# Altium PCB NewPCB1.PcbDoc (part 2 of 2)
Units mil, origin at the board's own origin, x right, y up, seen from the top; angles counter-clockwise.
Board outline 6000 x 4000 mil, 2 copper layers (Top Layer, Bottom Layer); 429 components, 190 nets, 1158 pads, 636 vias.
Unrouted connection lines stored in the file: 845.
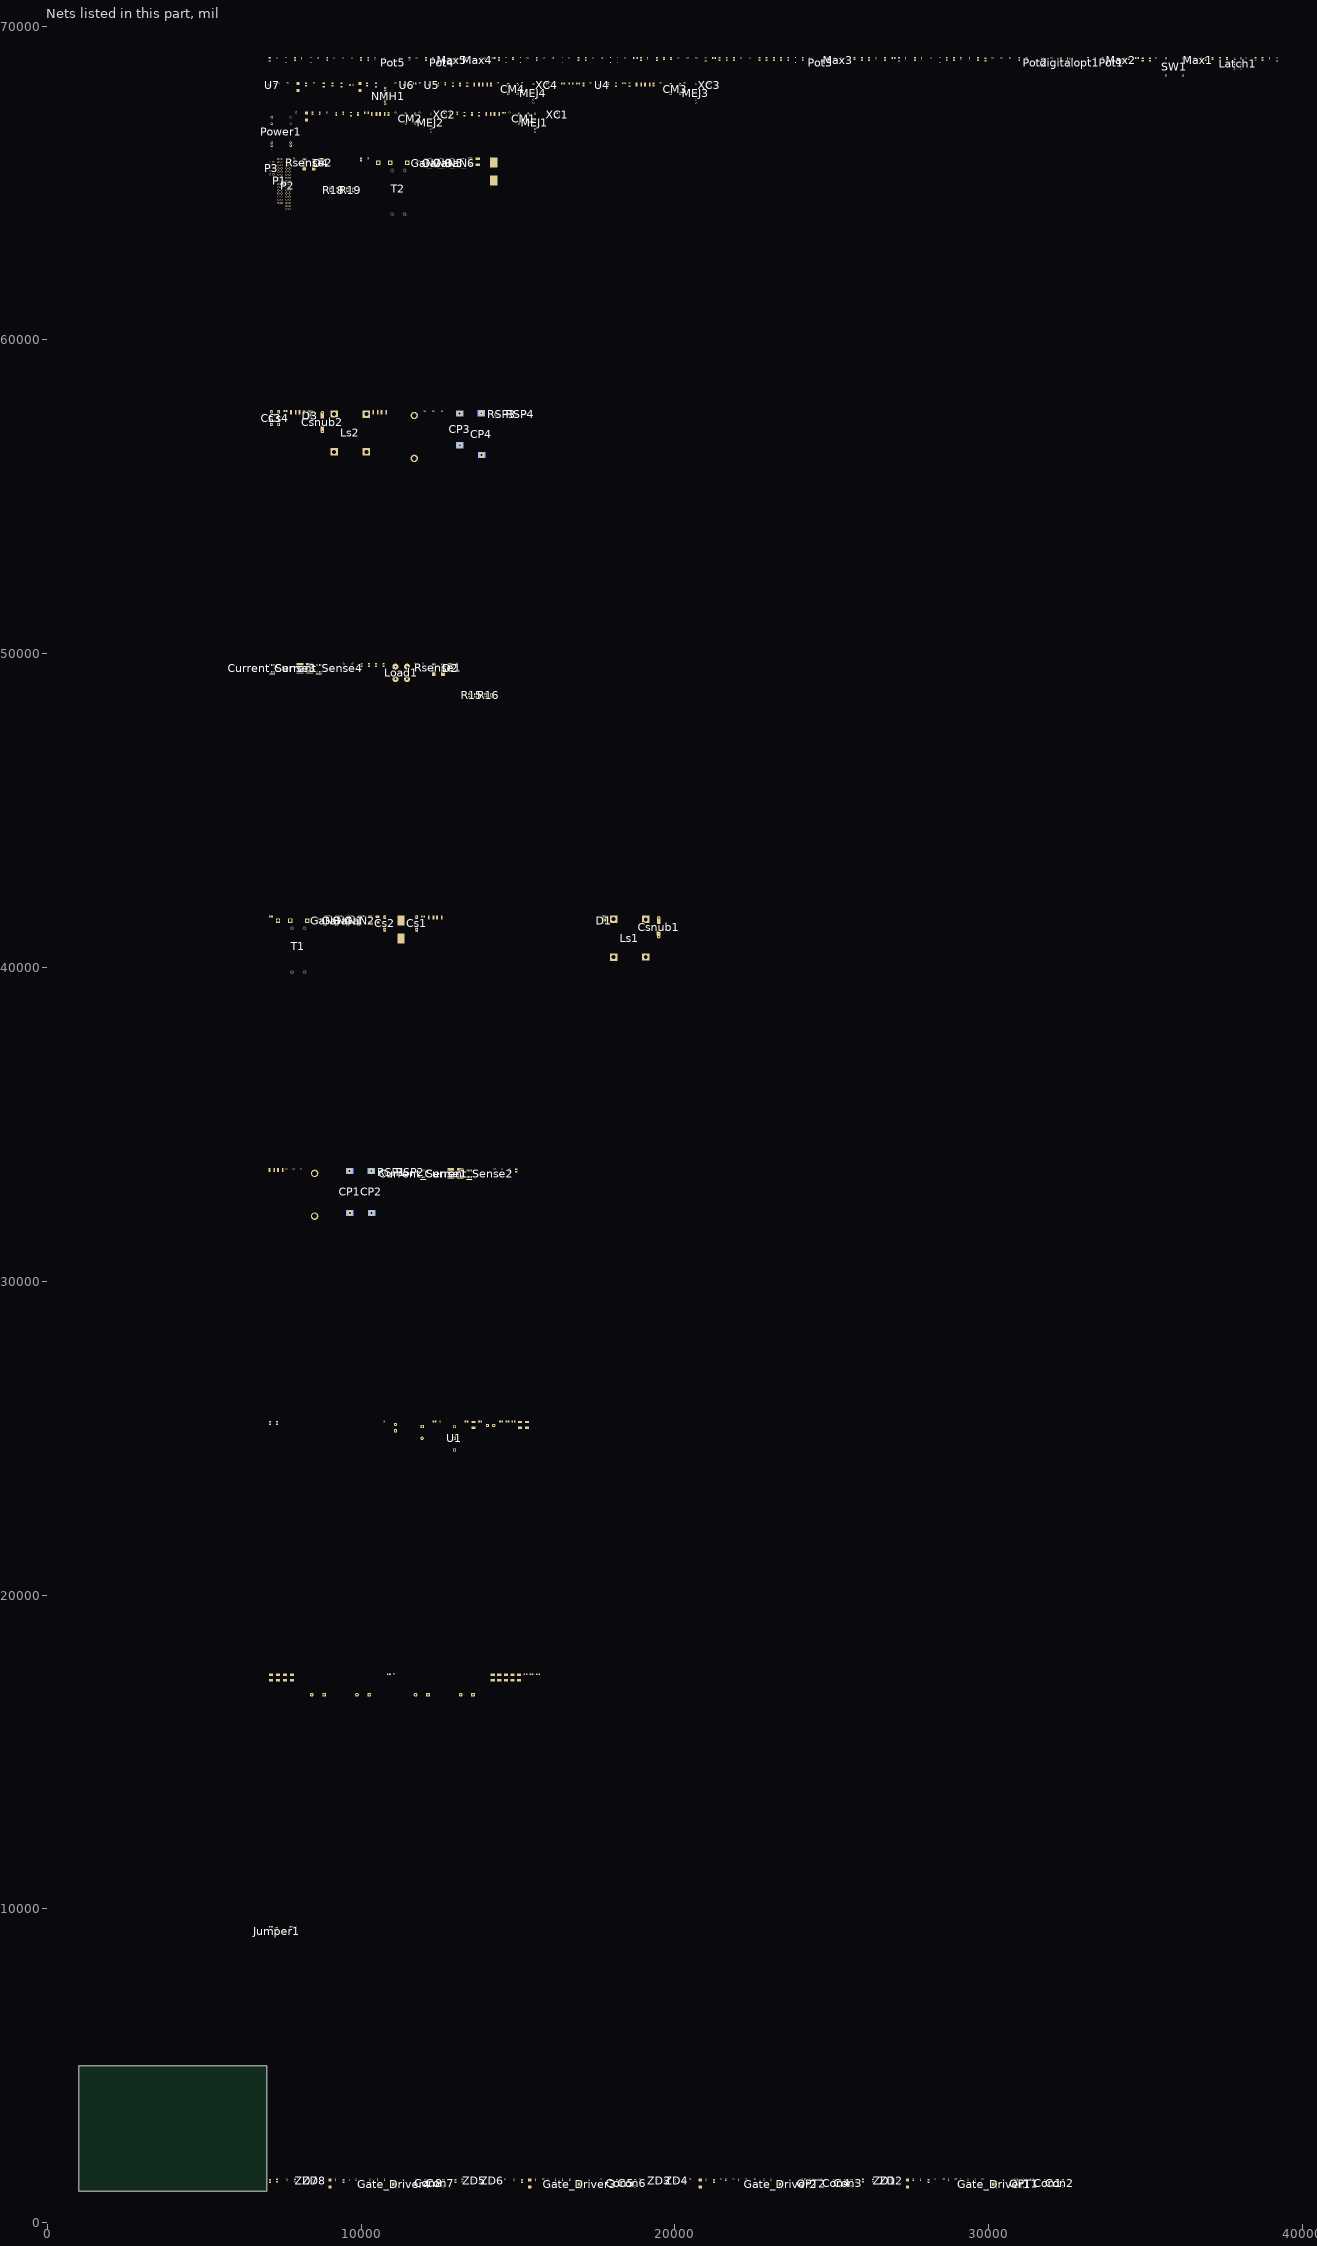
[diagram p2: the nets of this part, all layers, seen from the top]

## Part data
C1 C2 C8 C9: "LLS2A332MELC"
C17 C18 C19 C20 C27 C28 C29 C30 C39 C41 C44 C46 C47 C49 C50 C52 C70 C71 C73 C74: library part Cap_SMD
  C17 C18 C19 C20 C27 C28 C29 C30: =100nF
  C44 C70 C71 C73 C74: =470nF
C21 C22 C23 C24 C31 C32 C33 C34 C54 C57 C58 C59 C62 C63 C64 C67 C69 C72 C76 C79 C80 C82 C83 C84 C86 C87 C90 C94 C95 C98: "Polarized Capacitor (Surface Mount)", LatestRevisionDate=29-May-2009, LatestRevisionNote="IPC-7351 Footprint Added.", PackageDescription="Chip Capacitor", PackageReference=C0805, Published=8-Jun-2000, Publisher="Altium Limited"
C37 C38 C42 C43 C91 C93 C99 C102 C105 C107: "Capacitor", LatestRevisionDate=17-Jul-2002, LatestRevisionNote="Re-released for DXP Platform.", PackageReference=RAD-0.3, Published=8-Jun-2000, Publisher="Altium Limited"
C40 C45 C48 C51 C65: library part Cap_tantalum
  C65: ="22uF/ 25V"
C53: library part "Cap Pol3", "Polarized Capacitor (Surface Mount)", LatestRevisionDate=29-May-2009, LatestRevisionNote="IPC-7351 Footprint Added.", PackageDescription="Chip Capacitor", PackageReference=C0805, Published=8-Jun-2000, Publisher="Altium Limited"
C55 C66 C68 C75 C77 C78 C81 C85: library part "Cap Semi", "Capacitor (Semiconductor SIM Model)", LatestRevisionDate=29-May-2009, LatestRevisionNote="IPC-7351 Footprint Added.", PackageDescription="Chip Capacitor", PackageReference=C1206, Published=8-Jun-2000, Publisher="Altium Limited"
C56 C60 C61 C88 C89 C96 C97: "Capacitor (Semiconductor SIM Model)", LatestRevisionDate=29-May-2009, LatestRevisionNote="IPC-7351 Footprint Added.", PackageDescription="Chip Capacitor", PackageReference=C1206, Published=8-Jun-2000, Publisher="Altium Limited"
C92 C100 C101 C103 C104 C106 C108: library part "Cap Pol1", "Polarized Capacitor (Radial)", LatestRevisionDate=17-Jul-2002, LatestRevisionNote="Re-released for DXP Platform.", PackageReference=RB7.6-15, Published=8-Jun-2000, Publisher="Altium Limited"
Cd1 Cd2 Cd3: library part Cd
CM1 CM2 CM3 CM4: "Common mode choke"
Cs1 Cs2 Cs3 Cs4: library part Cap-CS
  Cs4: =990pF
Csnub1 Csnub2: library part Cap-Csnub, =10nF
Current_Sense1 Current_Sense2 Current_Sense3 Current_Sense4: library part "Current Sensor 5A"
D1 D2 D3 D4: "VS-4ESH02HM3"
digitalopt1: library part "Digital Isolator"
FB1 FB2 FB3 FB4 FB5 FB6 FB7 FB8 FB9 FB10 FB11 FB12 FB13 FB14 FB15 FB16 FB17 FB18 R21 R22 R23 R24 R26 R27 R28 R29 R31 R32 R33 R34 R35 R36 R37 R38 R39 R40: "Resistor", LatestRevisionDate=29-May-2009, LatestRevisionNote="IPC-7351 Footprint Added.", PackageDescription="Chip Resistor", PackageReference=J1-0603, Published=8-Jun-2000, Publisher="Altium Limited"
Gate_Driver1 Gate_Driver2 Gate_Driver3 Gate_Driver4: library part "Gate driver low side"
Grid1: library part "Auxilary connector"
Latch1: library part "SR Latch", "CD4043BDR"
Max1 Max3 Max4: library part Max942, "MAX942ESA+"
Max2 Max5: library part Max9919, "MAX9919NASA+"
MEJ1 MEJ2 MEJ3 MEJ4: library part "Power supply2"
NMH1: library part NMH----SC_1
OPT1 OPT2: library part Component_1
P1: library part "Header 15X2", "Header, 15-Pin, Dual row", LatestRevisionDate=17-Jul-2002, LatestRevisionNote="Re-released for DXP Platform.", Publisher="Altium Limited"
P2: library part "Header 16X2", "Header, 16-Pin, Dual row", LatestRevisionDate=17-Jul-2002, LatestRevisionNote="Re-released for DXP Platform.", Publisher="Altium Limited"
P3: "Header, 5-Pin, Dual row", LatestRevisionDate=17-Jul-2002, LatestRevisionNote="Re-released for DXP Platform.", Publisher="Altium Limited"
Pot1 Pot2 Pot3 Pot4 Pot5: library part "TRIM POT", "3296W-1-253LF"
Power1: library part Power_main
R1 R2 R3 R4 R5 R6 R7 R8 R9 R10 R11 R12 R13 R14 R17 R20 R41 R42 R43 R44 R45 R46 R47 R48 R49 R50 R51 R52 R53 R54 R55 R56 R57 R58 R59 R60 R61 R62 R63 R64 R65 R66 R67 R68 R69 R70 R71 R72 R73 R74 R75 R76 R77 R78 R79 R80 R81 R82 R83 R84 R85 R86 R87 R88 R89 R90 R91 R92 R93 R94 R95 Rdis1 Rdis2 Rdis3 Rdis4 Rdis5 Rdis6 Rdis7 Rdis8: "smd_res"
  R1 R12: =180K
  R2 R3 R4 R5 R7 R8 R9 R11: =475K
  R6 R10: =5K
  R13 R17 R50 R52 R64 R82 R83: =120K
  R14: =1.8k
  R20: =1.8K
  R41 R44 R90 R93: =22k
  R42 R45 R91 R94: =392
  R43 R46 R47 R51 R53 R54 R55 R56 R58 R62 R76 R84 R86 R87 R89 R92 R95: =10k
  R48 R57 R75 R79 R81 R85 R88: =3.3k
  R49: =1meg
  R59 R60 R61 R63: =4.7k
  R66 R67 R68 R69 R71 R72 R73 R74: =475k
  R70 R77 R78 R80: =100
R15 R16 R18 R19: "snubber_res_film"
  R15 R16 R19: ="5 ohm"
  R18: =5ohm
R25 R30: library part Res3, "Resistor", LatestRevisionDate=29-May-2009, LatestRevisionNote="IPC-7351 Footprint Added.", PackageDescription="Chip Resistor", PackageReference=J1-0603, Published=8-Jun-2000, Publisher="Altium Limited"
RSP3: library part Res_Rd
SW1: library part SW-PB, "Switch", Published=24-Mar-1999, Publisher="Altium Limited", Revision="July-2002: Re-released for DXP Platform."
U1: library part "P-Terminal 3"
U2: library part "P-Terminal 2"
U4 U5 U6: library part L78L05ABZ, "Positive Voltage Regulator", ComponentLink1Description="Manufacturer Link", ComponentLink1URL=http://www.st.com/, DatasheetVersion=Feb-1999, LatestRevisionDate=17-Jul-2002, LatestRevisionNote="Re-released for DXP Platform.", PackageDescription="TO, Flat Index; 3 In-Line, Axial Leads; Body Dia. 4.8mm; Leads 0.51 x 0.51 mm (max)", PackageReference=TO92, Published=24-Aug-2001, Publisher="Altium Limited"
U7: library part µA79M05CKTPR, "Negative-Voltage Regulator", Code_JEDEC=TO-252, ComponentLink1Description="Manufacturer Link", ComponentLink1URL=http://www.ti.com/, ComponentLink2Description=Datasheet, ComponentLink2URL=http://www-s.ti.com/sc/ds/ua79m05.pdf, DatasheetVersion=Apr-2000, Note="Pin 2 is electrically connected to pin4, and not drawn.", PackageDescription="PowerFLEX (D-PAK/TO-252-AA); 3 Leads (1 Cropped); Body 9.7 (inc. leads) x 6.2 mm (LxW max)", PackageReference=KTP02, PackageVersion=Jan-2001, Published=15-Apr-2002, Publisher="Altium Limited"
XC1 XC2 XC3 XC4: library part "power supply"
ZD1 ZD2 ZD3 ZD4 ZD5 ZD6 ZD7 ZD8: library part Zener_diode, "DZ23C8V2-7-F"
C3 C4 C5 C6 C7 C10 C11 C12 C13 C14 C15 C16: =10uF/100v
C25 C26 C35 C36: =2.2uF/250V
L_snub1 L_snub2: =2.5uH
RSP1: =5ohm
RSP2: ="5 ohm"

## Via types
v1: diameter 15, hole 12, Top Layer to Bottom Layer, 624 vias
v2: diameter 19.68, hole 7.87, Top Layer to Bottom Layer, 12 vias

## Nets (pads, with @x,y where several pads share a name; then routed paths per layer and width w, separated by ;. In a path a pad name is that pad's centre, name@x,y a point inside that pad or via, vN(x,y) a via of type N, cw(c..) or ccw(c..) an arc to the next point about the centre after c; other vN are vias at no path point)
5V_1: C38.1 OPT1.8
5V_2: C43.1 OPT2.8
+5V_1: C92.1 C93.2 TP66.1 U4.1
+5V_2: C100.1 C102.2 TP70.1 U5.1
+5V_P: C67.1 C73.2 digitalopt1.1 Latch1.16 R51.2 R55.2
DSP_3V3: C37.1 C42.1 digitalopt1.8 OPT1.1 OPT2.1 P1.28
DSP_5V: C17.1 C19.1 C27.1 C29.1 Current_Sense1.8 Current_Sense2.8 Current_Sense3.8 Current_Sense4.8 P2.1 P2.2
DSP_GND: C17.2 C18.2 C19.2 C20.2 C27.2 C28.2 C29.2 C30.2 C70.2 C71.2 C74.2 Current_Sense1.5 Current_Sense2.5 Current_Sense3.5 Current_Sense4.5 digitalopt1.5 P1.29 P1.30 P2.3 P2.4 P2.13 P2.14
DSPGND: C37.2 C42.2 OPT1.4 OPT2.4
G1: Gate_Driver1.6 Gate_Driver1.7 R22.1 R23.1 R24.1 R25.1 TP22.1
G2: Gate_Driver3.6 Gate_Driver3.7 R32.1 R33.1 R34.1 R35.1 TP27.1
G3: Gate_Driver2.6 Gate_Driver2.7 R27.1 R28.1 R29.1 R30.1 TP25.1
G4: Gate_Driver4.6 Gate_Driver4.7 R37.1 R38.1 R39.1 R40.1 TP29.1
GND: "Logic supply1.2" C1.- C2.- C3.2 C4.2 C5.2 C6.2 C7.2 C8.- C9.- C10.2 C11.2 C12.2 C13.2 C14.2 C15.2 C16.2 C53.2 C58.2 C63.2 C64.2 C65.2 C67.2 C69.2 C72.2 C73.1 C76.2 C77.1 C78.1 C79.2 C80.2 C81.2 C82.2 C83.2 C84.2 C86.2 C94.2 C101.2 C103.2 C104.2 C105.1 C106.1 C107.2 C108.1 CM1.4 CM2.4 CM3.4 CM4.4 D2.1 D4.1 digitalopt1.4 DZ1.2 DZ2.2 DZ3.2 DZ4.2 DZ5.2 DZ6.2 DZ7.2 DZ8.2 DZ9.2 DZ10.2 Latch1.8 Max1.4 Max2.3 Max2.4 Max2.9 Max3.4 Max4.4 Max5.3 Max5.4 Max5.9 NMH1.2 NMH1.5 P1.25 P1.26 P2.29 P2.30 P3.1 P3.3 P3.4 P3.5 P3.7 P3.8 P3.9 Pot1.3 Pot2.2 Pot3.2 Pot4.3 Pot5.2 Power1.2 Power1.3 Power1.16 R6.1 R10.1 R15.1 R18.1 R48.2 R49.1 R54.2 R56.1 R57.1 R75.2 R76.2 R79.1 R81.2 R86.1 R88.1 Rsense1.2 Rsense2.2 T1.2 T2.2 TP35.1 TP73.1 U1.2 U6.2 U7.1
  other v2: 12888.35,68861.69 12931.65,68861.69 34203.35,68861.69 34246.65,68861.69 12888.35,68905 12931.65,68905 34203.35,68905 34246.65,68905 12888.35,68948.31 12931.65,68948.31 34203.35,68948.31 34246.65,68948.31
GND_1: C38.2 C39.2 C40.2 C41.2 C88.1 C89.1 C90.2 C91.1 C92.2 C93.1 Con1.0 Con1.1 Con1.2 Con1.3 Con2.0 Con2.1 Con2.2 Con2.3 GaN1.SS GaN2.SS Gate_Driver1.3 Gate_Driver1.4 Gate_Driver1.5 MEJ3.5 OPT1.5 R91.2 R92.2 Rdis1.2 Rdis2.2 TP67.1 U4.2 XC3.2 ZD1.2 ZD2.2
GND_2: C43.2 C47.2 C48.2 C49.2 C96.1 C97.1 C98.2 C99.1 C100.2 C102.1 Con5.0 Con5.1 Con5.2 Con5.3 Con6.0 Con6.1 Con6.2 Con6.3 GaN5.SS GaN6.SS Gate_Driver3.3 Gate_Driver3.4 Gate_Driver3.5 MEJ4.5 OPT2.5 R94.2 R95.2 Rdis5.2 Rdis6.2 TP72.1 U5.2 XC4.2 ZD5.2 ZD6.2
GND_S: C25.2 C26.2 C35.2 C36.2 Ls1.3 Ls2.3 P2.19 P2.20 P2.25 P2.26 R14.1 R20.1 TP12.1
GND_SS1: C44.2 C45.2 C46.2 C55.1 C56.1 C57.2 Con3.0 Con3.1 Con3.2 Con3.3 Con4.0 Con4.1 Con4.2 Con4.3 GaN3.S GaN3.SS GaN4.S GaN4.SS Gate_Driver2.3 Gate_Driver2.4 Gate_Driver2.5 Ls1.4 MEJ1.5 P1.15 P1.16 R16.1 R42.2 R43.2 R71.2 Rdis3.2 Rdis4.2 T1.3 TP11.1 XC1.2 ZD3.2 ZD4.2
  other v1: 8933.03,41335.98 8958.03,41335.98 8983.03,41335.98 9008.03,41335.98 9033.03,41335.98 9058.03,41335.98 9293.03,41335.98 9318.03,41335.98 9343.03,41335.98 9368.03,41335.98 9393.03,41335.98 9418.03,41335.98 8933.03,41360.98 8958.03,41360.98 8983.03,41360.98 9008.03,41360.98 9033.03,41360.98 9058.03,41360.98 9293.03,41360.98 9318.03,41360.98 9343.03,41360.98 9368.03,41360.98 9393.03,41360.98 9418.03,41360.98 8808.03,41385.98 8833.03,41385.98 8858.03,41385.98 8883.03,41385.98 8908.03,41385.98 8933.03,41385.98 8958.03,41385.98 8983.03,41385.98 9008.03,41385.98 9033.03,41385.98 9058.03,41385.98 9168.03,41385.98 9193.03,41385.98 9218.03,41385.98 9243.03,41385.98 9268.03,41385.98 9293.03,41385.98 9318.03,41385.98 9343.03,41385.98 9368.03,41385.98 9393.03,41385.98 9418.03,41385.98 8808.03,41410.98 8833.03,41410.98 8858.03,41410.98 8883.03,41410.98 8908.03,41410.98 8933.03,41410.98 8958.03,41410.98 8983.03,41410.98 9008.03,41410.98 9033.03,41410.98 9058.03,41410.98 9168.03,41410.98 9193.03,41410.98 9218.03,41410.98 9243.03,41410.98 9268.03,41410.98 9293.03,41410.98 9318.03,41410.98 9343.03,41410.98 9368.03,41410.98 9393.03,41410.98 9418.03,41410.98 8808.03,41435.98 8833.03,41435.98 8858.03,41435.98 8883.03,41435.98 8908.03,41435.98 8933.03,41435.98 8958.03,41435.98 8983.03,41435.98 9008.03,41435.98 9033.03,41435.98 9058.03,41435.98 9168.03,41435.98 9193.03,41435.98 9218.03,41435.98 9243.03,41435.98 9268.03,41435.98 9293.03,41435.98 9318.03,41435.98 9343.03,41435.98 9368.03,41435.98 9393.03,41435.98 9418.03,41435.98 8808.03,41460.98 8833.03,41460.98 8858.03,41460.98 8883.03,41460.98 8908.03,41460.98 8933.03,41460.98 8958.03,41460.98 8983.03,41460.98 9008.03,41460.98 9033.03,41460.98 9058.03,41460.98 9168.03,41460.98 9193.03,41460.98 9218.03,41460.98 9243.03,41460.98 9268.03,41460.98 9293.03,41460.98 9318.03,41460.98 9343.03,41460.98 9368.03,41460.98 9393.03,41460.98 9418.03,41460.98 8808.03,41485.98 8833.03,41485.98 8858.03,41485.98 8883.03,41485.98 8908.03,41485.98 8933.03,41485.98 8958.03,41485.98 8983.03,41485.98 9008.03,41485.98 9033.03,41485.98 9058.03,41485.98 9168.03,41485.98 9193.03,41485.98 9218.03,41485.98 9243.03,41485.98 9268.03,41485.98 9293.03,41485.98 9318.03,41485.98 9343.03,41485.98 9368.03,41485.98 9393.03,41485.98 9418.03,41485.98 8808.03,41510.98 8833.03,41510.98 8858.03,41510.98 8883.03,41510.98 8908.03,41510.98 8933.03,41510.98 8958.03,41510.98 8983.03,41510.98 9008.03,41510.98 9033.03,41510.98 9058.03,41510.98 9168.03,41510.98 9193.03,41510.98 9218.03,41510.98 9243.03,41510.98 9268.03,41510.98 9293.03,41510.98 9318.03,41510.98 9343.03,41510.98 9368.03,41510.98 9393.03,41510.98 9418.03,41510.98
GND_SS2: C50.2 C51.2 C52.2 C60.1 C61.1 C62.2 Con7.0 Con7.1 Con7.2 Con7.3 Con8.0 Con8.1 Con8.2 Con8.3 GaN7.SS GaN8.SS Gate_Driver4.3 Gate_Driver4.4 Gate_Driver4.5 Ls2.4 MEJ2.5 P1.21 P1.22 R19.1 R45.2 R46.2 Rdis7.2 Rdis8.2 T2.3 TP19.1 XC2.2 ZD7.2 ZD8.2
Net2_2: FB12.2 TP51.1
Net2_3: R75.1 R77.2 TP52.1
Net2_4: R77.1
Net2_5: R78.1
Net2_6: DZ10.1 R79.2 R80.1 TP54.1
Net2_14: C69.1 C72.1 C76.1 C77.2 C79.1 C80.1 C82.1 C83.1 C84.1 C104.1 C105.2 Max1.8 Max2.8 Max3.8 Max4.8 Max5.8 R50.2 R52.2 R53.2 R64.2 R82.2 R83.2 R84.2 TP71.1 U6.1
Net3_4: DZ5.1 FB13.2 TP46.1
Net3_5: DZ6.1 FB14.2 TP49.1
Net3_6: DZ8.1 R78.2 R85.2 TP53.1
Net3_8: Latch1.4 R54.1 TP56.1
Net3_9: DZ7.1 FB15.2 TP55.1
Net3_10: R80.2
NetC16_1: C16.1 C63.1 Jumper1.2 Power1.22 Power1.23 TP2.1
NetC18_1: C18.1 Current_Sense1.6
NetC20_1: C20.1 Current_Sense2.6
NetC21_1: C21.1 C23.1 Cd1.1 CP1.1 Cs2.1 Csnub1.1 GaN1.D GaN2.D L1.2 TP7.1
NetC21_2: C21.2 C23.2 CP1.2 RSP1.1 T1.1
NetC22_1: C22.1 C24.1 Cd2.1 CP2.1 T1.4
NetC22_2: C22.2 C24.2 CP2.2 Cs1.1 GaN3.D GaN4.D Ls1.1 R66.2 RSP2.1 TP8.1
NetC25_1: C25.1 C26.1 Current_Sense2.1 Current_Sense2.2 Ls1.2 R13.2 TP9.1
NetC28_1: C28.1 Current_Sense3.6
NetC30_1: C30.1 Current_Sense4.6
NetC31_1: C31.1 C33.1 Cd3.1 CP3.1 Cs3.1 Csnub2.1 GaN5.D GaN6.D L2.2 TP15.1
NetC31_2: C31.2 C33.2 CP3.2 RSP3.1 T2.1
NetC32_1: C32.1 C34.1 Cd4.1 CP4.1 T2.4
NetC32_2: C32.2 C34.2 CP4.2 Cs4.1 GaN7.D GaN8.D Ls2.1 RSP4.1 TP16.1
NetC35_1: C35.1 C36.1 Current_Sense4.1 Current_Sense4.2 Ls2.2 R17.2 TP17.1
NetC39_1: C39.1 C40.1 C90.1 Gate_Driver1.1 Gate_Driver1.8 R90.1 XC3.1
NetC41_1: C41.1 Gate_Driver1.2 R21.1 TP20.1
NetC44_1: C44.1 C45.1 C57.1 Gate_Driver2.1 Gate_Driver2.8 R41.1 XC1.1
NetC46_1: C46.1 Gate_Driver2.2 R26.1 TP23.1
NetC47_1: C47.1 C48.1 C98.1 Gate_Driver3.1 Gate_Driver3.8 R93.1 XC4.1
NetC49_1: C49.1 Gate_Driver3.2 R31.1 TP26.1
NetC50_1: C50.1 C51.1 C62.1 Gate_Driver4.1 Gate_Driver4.8 R44.1 XC2.1
NetC52_1: C52.1 Gate_Driver4.2 R36.1 TP28.1
NetC53_1: C53.1 C58.1 C64.1 C65.1 C86.1 C94.1 C103.1 CM1.1 CM2.1 CM3.1 CM4.1 NMH1.1 P1.11 P1.12 P3.2 Power1.14 TP34.1
NetC54_1: C54.1 CM1.2 MEJ1.1 TP30.1
NetC54_2: C54.2 CM1.3 MEJ1.2
NetC55_2: C55.2 C56.2 MEJ1.7 P1.17 P1.18 R42.1 TP31.1 XC1.3 XC1.5
NetC59_1: C59.1 CM2.2 MEJ2.1 TP32.1
NetC59_2: C59.2 CM2.3 MEJ2.2
NetC60_2: C60.2 C61.2 MEJ2.7 P1.23 P1.24 R45.1 TP33.1 XC2.3 XC2.5
NetC66_1: C66.1 R47.2 Rsense1.3 TP36.1
NetC68_1: C68.1 FB9.1 R47.1
NetC68_2: C68.2 Max2.2 Rsense1.4 TP42.1
NetC70_1: C70.1 C71.1
NetC74_1: C74.1 digitalopt1.7 P1.1 P1.2
NetC75_1: C75.1 R62.1 R70.2 TP47.1
NetC75_2: C75.2 R62.2 R69.1
NetC81_1: C81.1 R74.1 R76.1 TP48.1
NetC85_1: C85.1 FB18.1 R89.1
NetC85_2: C85.2 Max5.2 Rsense2.4 TP61.1
NetC87_1: C87.1 CM3.2 MEJ3.1 TP64.1
NetC87_2: C87.2 CM3.3 MEJ3.2
NetC88_2: C88.2 C89.2 C91.2 MEJ3.7 R91.1 TP65.1 U4.3 XC3.3 XC3.5
NetC95_1: C95.1 CM4.2 MEJ4.1 TP68.1
NetC95_2: C95.2 CM4.3 MEJ4.2
NetC96_2: C96.2 C97.2 C99.2 MEJ4.7 R94.1 TP69.1 U5.3 XC4.3 XC4.5
NetC101_1: C101.1 NMH1.6 U6.3
NetC106_2: C106.2 C107.1 TP74.1 U7.3
NetC108_2: C108.2 NMH1.4 U7.4
NetCd1_2: Cd1.2 RSP1.2
NetCd2_2: Cd2.2 RSP2.2
NetCd3_2: Cd3.2 RSP3.2
NetCd4_2: Cd4.2 RSP4.2
NetCon1_4: Con1.4 D5.1 FB1.1 R22.2 Rdis1.1
NetCon2_4: Con2.4 D6.1 FB2.1 R23.2 Rdis2.1
NetCon3_4: Con3.4 D8.1 FB4.1 R28.2 Rdis4.1
NetCon4_4: Con4.4 D7.1 FB3.1 R27.2 Rdis3.1
NetCon5_4: Con5.4 D9.1 FB5.1 R32.2 Rdis5.1
NetCon6_4: Con6.4 D10.1 FB6.1 R33.2 Rdis6.1
NetCon7_4: Con7.4 D12.1 FB8.1 R38.2 Rdis8.1
NetCon8_4: Con8.4 D11.1 FB7.1 R37.2 Rdis7.1
NetCs1_2: Cs1.2 R16.2
NetCs2_2: Cs2.2 R15.2
NetCs3_2: Cs3.2 R18.2
NetCs4_2: Cs4.2 R19.2
NetCsnub1_2: Csnub1.2 D1.1 L_snub1.2
NetCsnub2_2: Csnub2.2 D3.1 L_snub2.2
NetCurrent_Sense1_3: Current_Sense1.3 Current_Sense1.4 D1.2 L1.1
NetCurrent_Sense1_7: Current_Sense1.7 P2.5 P2.6 TP5.1
NetCurrent_Sense2_3: Current_Sense2.3 Current_Sense2.4 Load1.1
NetCurrent_Sense2_7: Current_Sense2.7 P2.9 P2.10 TP6.1
NetCurrent_Sense3_3: Current_Sense3.3 Current_Sense3.4 D3.2 L2.1
NetCurrent_Sense3_7: Current_Sense3.7 P2.7 P2.8 TP13.1
NetCurrent_Sense4_3: Current_Sense4.3 Current_Sense4.4 Load1.2
NetCurrent_Sense4_7: Current_Sense4.7 P2.11 P2.12 TP14.1
NetD2_2: D2.2 L_snub1.1 TP10.1
NetD4_2: D4.2 L_snub2.1 TP18.1
NetD5_0: D5.0 R24.2
NetD6_0: D6.0 R25.2
NetD7_0: D7.0 R29.2
NetD8_0: D8.0 R30.2
NetD9_0: D9.0 R35.2
NetD10_0: D10.0 R34.2
NetD11_0: D11.0 R39.2
NetD12_0: D12.0 R40.2
Netdigitalopt1_2: digitalopt1.2 Latch1.2 TP37.1
NetDZ1_1: DZ1.1 FB10.2 Max1.3 Max1.6 TP43.1
NetDZ2_1: DZ2.1 FB11.2 TP50.1
NetDZ3_1: DZ3.1 Max1.7 R57.2 R60.2
NetDZ4_1: DZ4.1 FB16.2 Max3.3
NetDZ9_1: DZ9.1 FB17.2 Max4.6 TP62.1
NetFB1_2: FB1.2 FB2.2 GaN1.G GaN2.G ZD1.1 ZD2.1
NetFB3_2: FB3.2 FB4.2 GaN3.G GaN4.G ZD3.1 ZD4.1
NetFB5_2: FB5.2 FB6.2 GaN5.G GaN6.G ZD5.1 ZD6.1
NetFB7_2: FB7.2 FB8.2 GaN7.G GaN8.G ZD7.1 ZD8.1
NetFB9_2: FB9.2 Max2.1 TP38.1
NetFB10_1: FB10.1 R58.1
NetFB11_1: FB11.1 R59.1
NetFB12_1: FB12.1 R60.1
NetFB13_1: FB13.1 R61.1
NetFB14_1: FB14.1 R63.1
NetFB15_1: FB15.1 R65.1
NetFB16_1: FB16.1 R70.1
NetFB17_1: FB17.1 R87.1
NetFB18_2: FB18.2 Max5.1 TP57.1
NetGaN1_S: GaN1.S GaN2.S Rsense1.1
  other v1: 9653.03,41335.98 9678.03,41335.98 9703.03,41335.98 9728.03,41335.98 9753.03,41335.98 9778.03,41335.98 10013.03,41335.98 10038.03,41335.98 10063.03,41335.98 10088.03,41335.98 10113.03,41335.98 10138.03,41335.98 9653.03,41360.98 9678.03,41360.98 9703.03,41360.98 9728.03,41360.98 9753.03,41360.98 9778.03,41360.98 10013.03,41360.98 10038.03,41360.98 10063.03,41360.98 10088.03,41360.98 10113.03,41360.98 10138.03,41360.98 9528.03,41385.98 9553.03,41385.98 9578.03,41385.98 9603.03,41385.98 9628.03,41385.98 9653.03,41385.98 9678.03,41385.98 9703.03,41385.98 9728.03,41385.98 9753.03,41385.98 9778.03,41385.98 9888.03,41385.98 9913.03,41385.98 9938.03,41385.98 9963.03,41385.98 9988.03,41385.98 10013.03,41385.98 10038.03,41385.98 10063.03,41385.98 10088.03,41385.98 10113.03,41385.98 10138.03,41385.98 9528.03,41410.98 9553.03,41410.98 9578.03,41410.98 9603.03,41410.98 9628.03,41410.98 9653.03,41410.98 9678.03,41410.98 9703.03,41410.98 9728.03,41410.98 9753.03,41410.98 9778.03,41410.98 9888.03,41410.98 9913.03,41410.98 9938.03,41410.98 9963.03,41410.98 9988.03,41410.98 10013.03,41410.98 10038.03,41410.98 10063.03,41410.98 10088.03,41410.98 10113.03,41410.98 10138.03,41410.98 9528.03,41435.98 9553.03,41435.98 9578.03,41435.98 9603.03,41435.98 9628.03,41435.98 9653.03,41435.98 9678.03,41435.98 9703.03,41435.98 9728.03,41435.98 9753.03,41435.98 9778.03,41435.98 9888.03,41435.98 9913.03,41435.98 9938.03,41435.98 9963.03,41435.98 9988.03,41435.98 10013.03,41435.98 10038.03,41435.98 10063.03,41435.98 10088.03,41435.98 10113.03,41435.98 10138.03,41435.98 9528.03,41460.98 9553.03,41460.98 9578.03,41460.98 9603.03,41460.98 9628.03,41460.98 9653.03,41460.98 9678.03,41460.98 9703.03,41460.98 9728.03,41460.98 9753.03,41460.98 9778.03,41460.98 9888.03,41460.98 9913.03,41460.98 9938.03,41460.98 9963.03,41460.98 9988.03,41460.98 10013.03,41460.98 10038.03,41460.98 10063.03,41460.98 10088.03,41460.98 10113.03,41460.98 10138.03,41460.98 9528.03,41485.98 9553.03,41485.98 9578.03,41485.98 9603.03,41485.98 9628.03,41485.98 9653.03,41485.98 9678.03,41485.98 9703.03,41485.98 9728.03,41485.98 9753.03,41485.98 9778.03,41485.98 9888.03,41485.98 9913.03,41485.98 9938.03,41485.98 9963.03,41485.98 9988.03,41485.98 10013.03,41485.98 10038.03,41485.98 10063.03,41485.98 10088.03,41485.98 10113.03,41485.98 10138.03,41485.98 9528.03,41510.98 9553.03,41510.98 9578.03,41510.98 9603.03,41510.98 9628.03,41510.98 9653.03,41510.98 9678.03,41510.98 9703.03,41510.98 9728.03,41510.98 9753.03,41510.98 9778.03,41510.98 9888.03,41510.98 9913.03,41510.98 9938.03,41510.98 9963.03,41510.98 9988.03,41510.98 10013.03,41510.98 10038.03,41510.98 10063.03,41510.98 10088.03,41510.98 10113.03,41510.98 10138.03,41510.98
NetGaN5_S: GaN5.S GaN6.S Rsense2.1
  other v1: 12843.03,65485.98 12868.03,65485.98 12893.03,65485.98 12918.03,65485.98 12943.03,65485.98 12968.03,65485.98 13203.03,65485.98 13228.03,65485.98 13253.03,65485.98 13278.03,65485.98 13303.03,65485.98 13328.03,65485.98 12843.03,65510.98 12868.03,65510.98 12893.03,65510.98 12918.03,65510.98 12943.03,65510.98 12968.03,65510.98 13203.03,65510.98 13228.03,65510.98 13253.03,65510.98 13278.03,65510.98 13303.03,65510.98 13328.03,65510.98 12718.03,65535.98 12743.03,65535.98 12768.03,65535.98 12793.03,65535.98 12818.03,65535.98 12843.03,65535.98 12868.03,65535.98 12893.03,65535.98 12918.03,65535.98 12943.03,65535.98 12968.03,65535.98 13078.03,65535.98 13103.03,65535.98 13128.03,65535.98 13153.03,65535.98 13178.03,65535.98 13203.03,65535.98 13228.03,65535.98 13253.03,65535.98 13278.03,65535.98 13303.03,65535.98 13328.03,65535.98 12718.03,65560.98 12743.03,65560.98 12768.03,65560.98 12793.03,65560.98 12818.03,65560.98 12843.03,65560.98 12868.03,65560.98 12893.03,65560.98 12918.03,65560.98 12943.03,65560.98 12968.03,65560.98 13078.03,65560.98 13103.03,65560.98 13128.03,65560.98 13153.03,65560.98 13178.03,65560.98 13203.03,65560.98 13228.03,65560.98 13253.03,65560.98 13278.03,65560.98 13303.03,65560.98 13328.03,65560.98 12718.03,65585.98 12743.03,65585.98 12768.03,65585.98 12793.03,65585.98 12818.03,65585.98 12843.03,65585.98 12868.03,65585.98 12893.03,65585.98 12918.03,65585.98 12943.03,65585.98 12968.03,65585.98 13078.03,65585.98 13103.03,65585.98 13128.03,65585.98 13153.03,65585.98 13178.03,65585.98 13203.03,65585.98 13228.03,65585.98 13253.03,65585.98 13278.03,65585.98 13303.03,65585.98 13328.03,65585.98 12718.03,65610.98 12743.03,65610.98 12768.03,65610.98 12793.03,65610.98 12818.03,65610.98 12843.03,65610.98 12868.03,65610.98 12893.03,65610.98 12918.03,65610.98 12943.03,65610.98 12968.03,65610.98 13078.03,65610.98 13103.03,65610.98 13128.03,65610.98 13153.03,65610.98 13178.03,65610.98 13203.03,65610.98 13228.03,65610.98 13253.03,65610.98 13278.03,65610.98 13303.03,65610.98 13328.03,65610.98 12718.03,65635.98 12743.03,65635.98 12768.03,65635.98 12793.03,65635.98 12818.03,65635.98 12843.03,65635.98 12868.03,65635.98 12893.03,65635.98 12918.03,65635.98 12943.03,65635.98 12968.03,65635.98 13078.03,65635.98 13103.03,65635.98 13128.03,65635.98 13153.03,65635.98 13178.03,65635.98 13203.03,65635.98 13228.03,65635.98 13253.03,65635.98 13278.03,65635.98 13303.03,65635.98 13328.03,65635.98 12718.03,65660.98 12743.03,65660.98 12768.03,65660.98 12793.03,65660.98 12818.03,65660.98 12843.03,65660.98 12868.03,65660.98 12893.03,65660.98 12918.03,65660.98 12943.03,65660.98 12968.03,65660.98 13078.03,65660.98 13103.03,65660.98 13128.03,65660.98 13153.03,65660.98 13178.03,65660.98 13203.03,65660.98 13228.03,65660.98 13253.03,65660.98 13278.03,65660.98 13303.03,65660.98 13328.03,65660.98
NetGaN7_S: GaN7.S GaN8.S
  other v1: 12128.03,65485.98 12153.03,65485.98 12178.03,65485.98 12203.03,65485.98 12228.03,65485.98 12253.03,65485.98 12483.03,65485.98 12508.03,65485.98 12533.03,65485.98 12558.03,65485.98 12583.03,65485.98 12608.03,65485.98 12128.03,65510.98 12153.03,65510.98 12178.03,65510.98 12203.03,65510.98 12228.03,65510.98 12253.03,65510.98 12483.03,65510.98 12508.03,65510.98 12533.03,65510.98 12558.03,65510.98 12583.03,65510.98 12608.03,65510.98 12003.03,65535.98 12028.03,65535.98 12053.03,65535.98 12078.03,65535.98 12103.03,65535.98 12128.03,65535.98 12153.03,65535.98 12178.03,65535.98 12203.03,65535.98 12228.03,65535.98 12253.03,65535.98 12358.03,65535.98 12383.03,65535.98 12408.03,65535.98 12433.03,65535.98 12458.03,65535.98 12483.03,65535.98 12508.03,65535.98 12533.03,65535.98 12558.03,65535.98 12583.03,65535.98 12608.03,65535.98 12003.03,65560.98 12028.03,65560.98 12053.03,65560.98 12078.03,65560.98 12103.03,65560.98 12128.03,65560.98 12153.03,65560.98 12178.03,65560.98 12203.03,65560.98 12228.03,65560.98 12253.03,65560.98 12358.03,65560.98 12383.03,65560.98 12408.03,65560.98 12433.03,65560.98 12458.03,65560.98 12483.03,65560.98 12508.03,65560.98 12533.03,65560.98 12558.03,65560.98 12583.03,65560.98 12608.03,65560.98 12003.03,65585.98 12028.03,65585.98 12053.03,65585.98 12078.03,65585.98 12103.03,65585.98 12128.03,65585.98 12153.03,65585.98 12178.03,65585.98 12203.03,65585.98 12228.03,65585.98 12253.03,65585.98 12358.03,65585.98 12383.03,65585.98 12408.03,65585.98 12433.03,65585.98 12458.03,65585.98 12483.03,65585.98 12508.03,65585.98 12533.03,65585.98 12558.03,65585.98 12583.03,65585.98 12608.03,65585.98 12003.03,65610.98 12028.03,65610.98 12053.03,65610.98 12078.03,65610.98 12103.03,65610.98 12128.03,65610.98 12153.03,65610.98 12178.03,65610.98 12203.03,65610.98 12228.03,65610.98 12253.03,65610.98 12358.03,65610.98 12383.03,65610.98 12408.03,65610.98 12433.03,65610.98 12458.03,65610.98 12483.03,65610.98 12508.03,65610.98 12533.03,65610.98 12558.03,65610.98 12583.03,65610.98 12608.03,65610.98 12003.03,65635.98 12028.03,65635.98 12053.03,65635.98 12078.03,65635.98 12103.03,65635.98 12128.03,65635.98 12153.03,65635.98 12178.03,65635.98 12203.03,65635.98 12228.03,65635.98 12253.03,65635.98 12358.03,65635.98 12383.03,65635.98 12408.03,65635.98 12433.03,65635.98 12458.03,65635.98 12483.03,65635.98 12508.03,65635.98 12533.03,65635.98 12558.03,65635.98 12583.03,65635.98 12608.03,65635.98 12003.03,65660.98 12028.03,65660.98 12053.03,65660.98 12078.03,65660.98 12103.03,65660.98 12128.03,65660.98 12153.03,65660.98 12178.03,65660.98 12203.03,65660.98 12228.03,65660.98 12253.03,65660.98 12358.03,65660.98 12383.03,65660.98 12408.03,65660.98 12433.03,65660.98 12458.03,65660.98 12483.03,65660.98 12508.03,65660.98 12533.03,65660.98 12558.03,65660.98 12583.03,65660.98 12608.03,65660.98
NetGrid1_1: Grid1.1 R5.1
NetGrid1_2: Grid1.2 R11.1
NetJumper1_1: "Logic supply1.1" Jumper1.1 TP3.1
NetLatch1_3: Latch1.3 R49.2 SW1.2
NetLatch1_5: Latch1.5 R55.1
NetMax1_1: Max1.1 R59.2
NetMax1_2: Max1.2 Pot1.1 R50.1 TP39.1
NetMax1_5: Max1.5 Pot2.1 R52.1 TP41.1
NetMax2_5: Max2.5 R58.2
NetMax2_7: Max2.7 R53.1 R56.2 TP40.1
NetMax3_1: Max3.1 R65.2
NetMax3_2: Max3.2 Pot3.1 R64.1 TP45.1
NetMax4_1: Max4.1 R61.2
NetMax4_2: Max4.2 Pot4.1 R82.1 TP58.1
NetMax4_5: Max4.5 Pot5.1 R83.1 TP60.1
NetMax4_7: Max4.7 R63.2 R88.2
NetMax5_5: Max5.5 R87.2
NetMax5_7: Max5.7 R84.1 R86.2 TP59.1
NetOPT1_2: OPT1.2 P1.7 P1.8
NetOPT1_7: OPT1.7 R21.2 TP21.1
NetOPT2_2: OPT2.2 P1.9 P1.10
NetOPT2_7: OPT2.7 R31.2 TP24.1
NetP1_3: P1.3 P1.4 P3.6
NetP1_13: P1.13 P1.14 R26.2
NetP1_19: P1.19 P1.20 R36.2
NetP2_15: P2.15 P2.16 R2.2
NetP2_17: P2.17 P2.18 R7.2
NetP2_21: P2.21 P2.22 R17.1 R20.2
NetP2_23: P2.23 P2.24 R13.1 R14.2
NetP2_27: P2.27 P2.28 R1.1 R6.2
NetP2_31: P2.31 P2.32 R10.2 R12.1
NetR2_1: R2.1 R3.2
NetR3_1: R3.1 R4.2
NetR4_1: R4.1 R5.2
NetR7_1: R7.1 R8.2
NetR8_1: R8.1 R9.2
NetR9_1: R9.1 R11.2
NetR41_2: R41.2 R43.1 XC1.4
NetR44_2: R44.2 R46.1 XC2.4
NetR51_1: R51.1 SW1.1
NetR66_1: R66.1 R67.2
NetR67_1: R67.1 R68.2
NetR68_1: R68.1 R69.2
NetR71_1: R71.1 R72.2
NetR72_1: R72.1 R73.2
NetR73_1: R73.1 R74.2
NetR89_2: R89.2 Rsense2.3 TP63.1
NetR90_2: R90.2 R92.1 XC3.4
NetR93_2: R93.2 R95.1 XC4.4
Vin1: C1.+ C2.+ C3.1 C4.1 C5.1 C6.1 C7.1 Current_Sense1.1 Current_Sense1.2 R1.2 TP1.1 U1.1 U2.1
Vin2: C8.+ C9.+ C10.1 C11.1 C12.1 C13.1 C14.1 C15.1 Current_Sense3.1 Current_Sense3.2 Jumper1.3 R12.2 TP4.1 U1.3 U2.2
pads on no net: C66.2 C78.2 digitalopt1.3 digitalopt1.6 digitalopt1.9 Latch1.1 Latch1.6 Latch1.7 Latch1.9 Latch1.10 Latch1.11 Latch1.12 Latch1.13 Latch1.14 Latch1.15 Max2.6 Max3.5 Max3.6 Max3.7 Max4.3 Max5.6 NMH1.15 OPT1.3 OPT1.6 OPT1.9 OPT2.3 OPT2.6 OPT2.9 P1.5 P1.6 P1.27 P3.10 Pot1.2 Pot2.3 Pot3.3 Pot4.2 Pot5.3 Power1.9 Power1.11 R48.1 R81.1 R85.1 T1.N T2.N TP44.1 U4.5 U5.5 U6.5 U7.5 ZD1.3 ZD2.3 ZD3.3 ZD4.3 ZD5.3 ZD6.3 ZD7.3 ZD8.3

## Text inside footprints (layer, text, board x,y; h text height)
C103: Top Overlay "+" at 9655,68040 h60; Top Overlay "-" at 9720,68045 h60
P1: Top Overlay "2" at 7390,64290 h39.37 r90; Top Overlay "1" at 7485,64290 h50 r90
P2: Top Overlay "2" at 7640,64065 h50 r90; Top Overlay "1" at 7740,64065 h50 r90; Top Overlay "31" at 7740,65725 h50 r90; Top Overlay "32" at 7640,65725 h50 r90
P3: Top Overlay "10" at 7125,65735 h50 r90; Top Overlay "9" at 7225,65735 h50 r90; Top Overlay "1" at 7225,65195 h50 r90; Top Overlay "2" at 7125,65175 h50 r90
T1: Top Overlay "1" at 7340,41600 h60; Top Overlay "2" at 7720,41600 h60; Top Overlay "3" at 8265,41595 h60; Top Overlay "4" at 8640,41590 h60
T2: Top Overlay "1" at 10530,65750 h60; Top Overlay "2" at 10910,65750 h60; Top Overlay "3" at 11455,65745 h60; Top Overlay "4" at 11830,65740 h60